# Altium PCB Sensor_Voltage_V1.1.PcbDoc
Units mm, origin at the board's own origin, x right, y up, seen from the top; angles counter-clockwise.
Board outline 74.8 x 24 mm, 2 copper layers (Top Layer, Bottom Layer), stack 1.58 mm thick; 41 components, 21 nets, 108 pads, 29 vias.
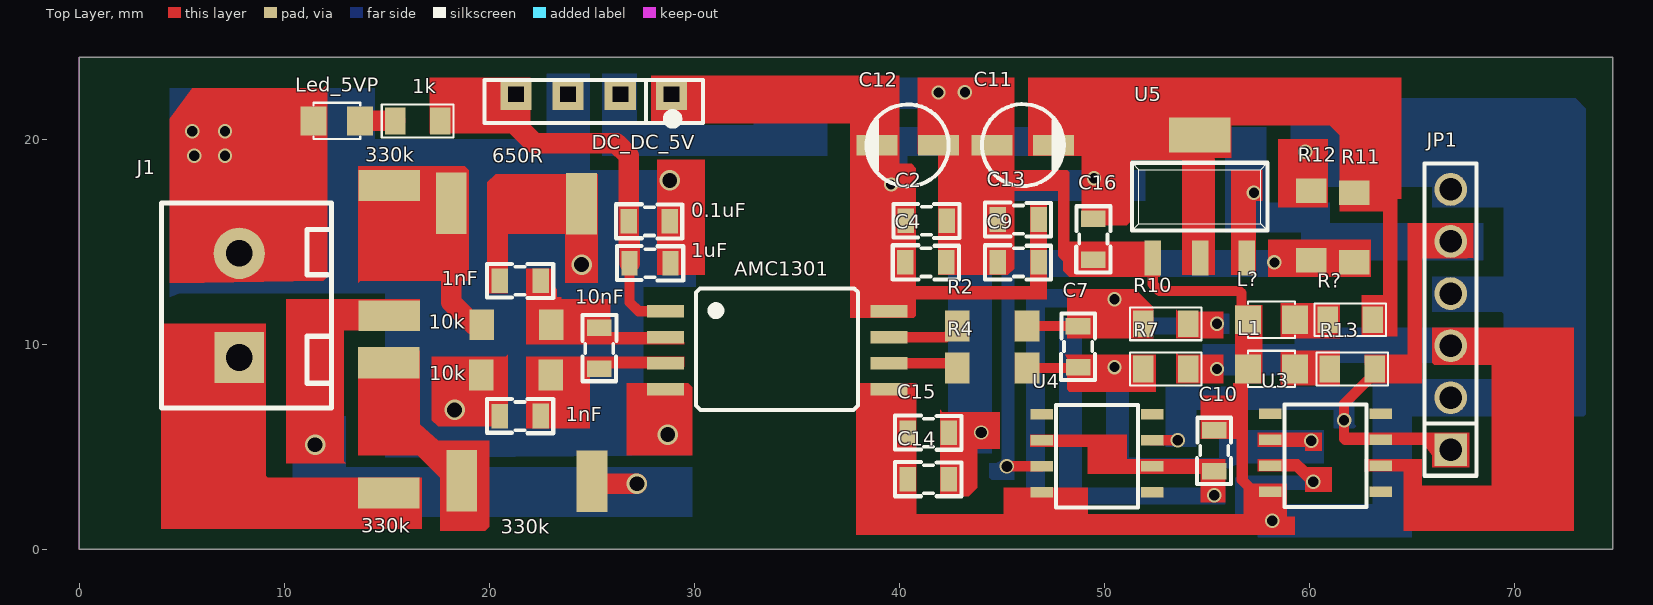
[diagram p0: Top Layer view]
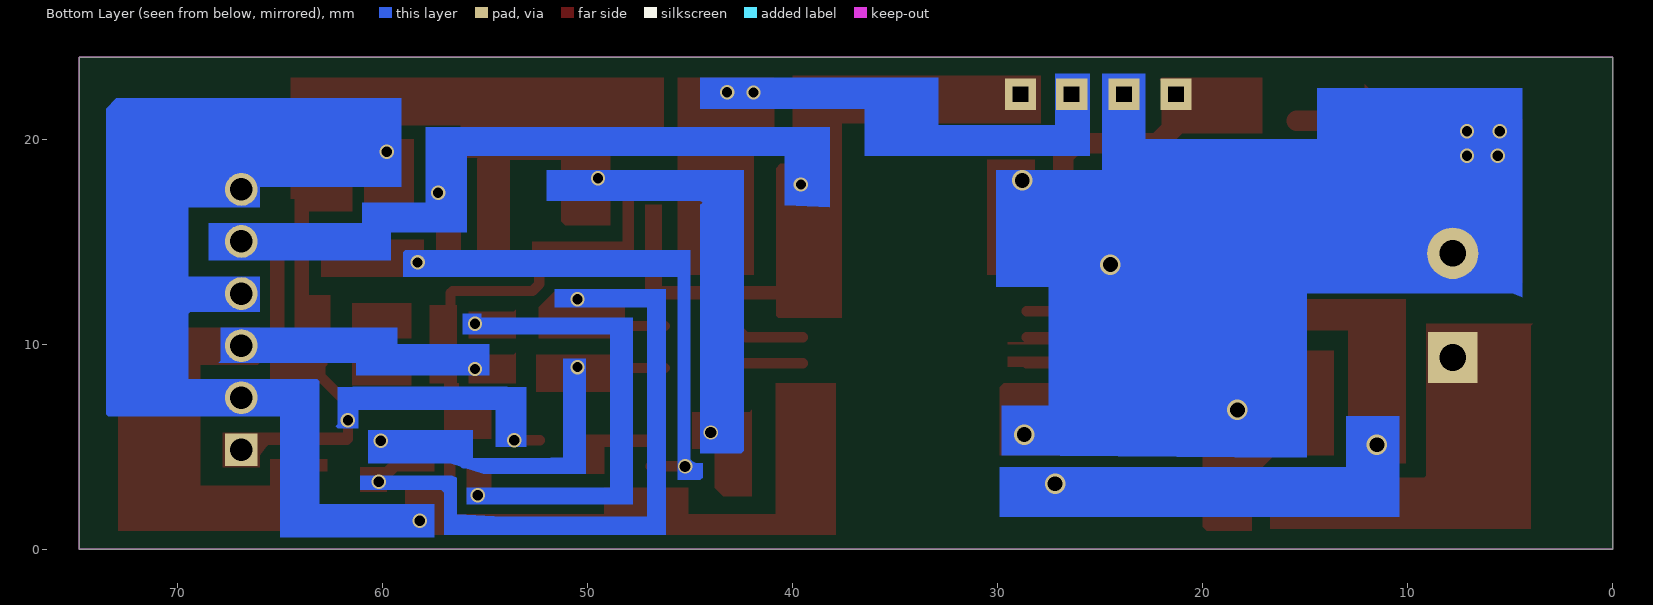
[diagram p1: Bottom Layer view, seen from below]
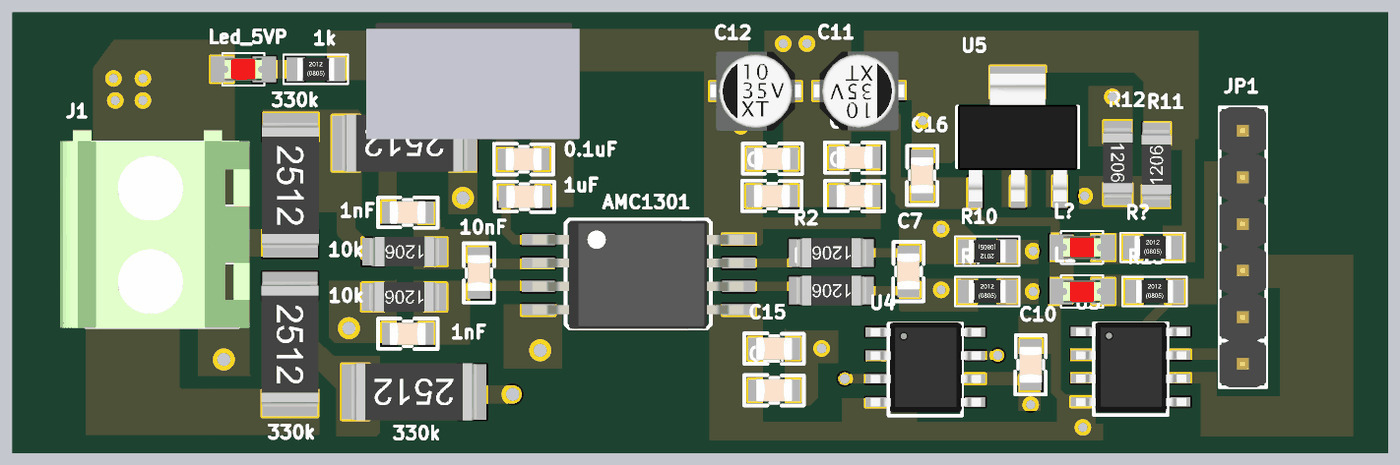
[diagram p2: 3D render of the assembled board from above, using the file's embedded part models]

## Layer stack, top to bottom
Top Solder: solder mask 0.01, Solder Resist, Dk 3.5
Top Layer: signal copper 0.035
Dielectric 1: dielectric 1.51, FR-4, Dk 4.8
Bottom Layer: signal copper 0.035
Bottom Solder: solder mask 0.01, Solder Resist, Dk 3.5

## Board outline
0,0 74.8,0 74.8,24 0,24

## Design rules (kind name [scope] priority, off if disabled: settings)
Clearance [All] p1: gap=0.5
PolygonConnect [All] p1: connectstyle=Relief reliefconductorwidth=0.254 reliefentries=4 polygonreliefangle="90 Angle" airgapwidth=0.254
RoutingVias [All] p1: holewidth=0.711 width=1.27 viastyle="Through Hole" minholewidth=0.711 minwidth=1.27 maxholewidth=0.711 maxwidth=1.27
SolderMaskExpansion [All] p1: expansion=0.102
Width [All] p1: maxlimit=2 minlimit=0.5 preferedwidth=0.5
30 further rules are at their usual default settings.

## Classes and differential pairs
component class Sensor_V1: 0.1uF 1k 1nF 1uF 10k 10nF 330k AMC1301 C2 C4 C7 C9 C10 C11 C12 C13 C14 C15 C16 DC_DC_5V J1 JP1 L1 L? led_5vP R R2 R4 R7 R10 R11 R12 R13 R? U3 U4 U5

## Components (designator, comment, footprint, x,y, rotation, side; value= is the part's Value field where it differs from the comment)
0.1uF "0.1uF" "Tu 0805_N" 27.8,16.003 r0 top (schematic designator C1)
1k "1K" RESC0805 16.5,20.9 r0 top (schematic designator R14)
1nF "1nF" "Tu 0805_N" 21.5,6.5 r180 top (schematic designator C6)
1nF "1nF" "Tu 0805_N" 21.5,13.1 r180 top (schematic designator C5)
1uF "1uF" "Tu 0805_N" 27.84,13.96 r180 top (schematic designator C3)
10k "10K" RES1206 21.32,10.96 r180 top (schematic designator R5)
10k "10K" RES1206 21.3,8.5 r180 top (schematic designator R1)
10nF "10nF" "Tu 0805_N" 25.37,9.81 r270 top (schematic designator C8)
330k "330K" RES_2512 14.892,5.934 r270 top (schematic designator R9)
330k "330K" RES_2512 21.844,3.538 r180 top (schematic designator R8)
330k "330K" RES_2512 14.91,14.58 r270 top (schematic designator R6)
650R "649" RES_2512 21.33,17.08 r180 top (schematic designator R3)
AMC1301 "AMC_1301" SOIC_8_SO8W 34.422,10.35 r0 top (schematic designator U1)
C2 "0.1uF" "Tu 0805_N" 41.32,16.027 r180 top
C4 "1uF" "Tu 0805_N" 41.3,14 r0 top
C7 "10nF" "Tu 0805_N" 48.72,9.89 r90 top
C9 "1uF" "Tu 0805_N" 45.8,14 r0 top
C10 "1uF" "Tu 0805_N" 55.36,4.81 r90 top
C11 "10uF_16V" tu_4x5.4mm 46.03,19.72 r180 top
C12 "10uF_16V" tu_4x5.4mm 40.41,19.71 r0 top
C13 "10nF" "Tu 0805_N" 45.8,16.093 r0 top
C14 "10nF" "Tu 0805_N" 41.42,3.42 r0 top
C15 "10nF" "Tu 0805_N" 41.42,5.69 r0 top
C16 "10nF" "Tu 0805_N" 49.467,15.13 r90 top
DC_DC_5V "DC_DC_5V" B0505S/D-1W 25.04,21.9 r0 top (schematic designator U2)
J1 "domino" domino_2pin_5.08mm 7.8,11.9 r90 top
JP1 "JP 1x6 2.54" "JP 1X6 DT" 66.9,4.86 r90 top
L1 "LED 0805" LED-0805-Red 59.3,8.8 r180 top
L? "LED 0805" LED-0805-Red 59.3,11.2 r180 top
Led_5VP "LED 0805" LED-0805-Red 13.7,20.9 r180 top (schematic designator L2)
R2 "10K" RES1206 44.53,10.9 r180 top
R4 "10K" RES1206 44.53,8.85 r180 top
R7 "7.5K" RESC0805 53,8.8 r0 top
R10 "7.5K" RESC0805 53,11 r180 top
R11 "1M" RES1206 62.2,15.7 r90 top
R12 "1M" RES1206 60.1,15.8 r270 top
R13 "1K" RESC0805 62.1,8.8 r0 top
R? "1K" RESC0805 62,11.2 r0 top
U3 "opamp_LM741" LM741 60.8,4.57 r0 top
U4 "opamp_LM741" LM741 49.64,4.55 r0 top
U5 "AMS1117_3.3V" TO-252 54.66,17.21 r0 top

## Footprints (in the part's own frame and the unit in brackets; to place one, negate y for a bottom-side part, rotate by r counter-clockwise, add the part's x,y. Pads: shape width x height; smd on the part's side, far side on the other; paste and mask are expansions set on the pad)
B0505S/D-1W [mm] "B0512S/D-1W"
  rect 1.52x1.52 hole 0.75 square: 1(3.85,0.3) 2(1.35,0.3) 3(-1.2,0.3) 4(-3.74,0.3)
  silkscreen extent -5.28,-1.12 5.38,1, body extent -5.8,-4.8 5.8,1.52, height 18.66
domino_2pin_5.08mm [mm]
  rect 2.5x2.4 hole 1.3: 1(-2.54,0)
  round 2.5 hole 1.3: 2(2.54,0)
  silkscreen extent -5,-4.5 5,3.8, body extent -5.08,-5.1 5.68,5.2, height 13.59
"JP 1X6 DT" [mm] "6 pins, 1 row, straight, gold plating"
  rect 1.6x1.6 hole 1.1: 1(0,0)
  round 1.6 hole 1.1: 2(2.54,0) 3(5.08,0) 4(7.62,0) 5(10.16,0) 6(12.7,0)
  silkscreen extent -1.27,-1.27 13.97,1.27, body extent -1.27,-1.27 13.97,1.27, height 8.54
LED-0805-Red [mil]
  rect 50x55 smd: 1(0,0) 2(90,0)
  silkscreen extent 0,-35 90,35, body extent 5,-25 85,25, height 43
LM741 [mm] "LM741"
  rect 1.1x0.51 smd: 1(-2.7,2.04) 3(-2.7,-0.5) 4(-2.7,-1.77) 5(2.7,-1.77) 6(2.7,-0.5) 7(2.7,0.77) 8(2.7,2.04)
  rect 1.1x0.52 smd: 2(-2.7,0.77)
  silkscreen extent -2,-2.5 2,2.5, body extent -2.98,-2.33 3.02,2.57, height 1.7
RES1206 [mm]
  rect 1.2x1.5 smd: 1(-1.7,0) 2(1.7,0)
  body extent -1.9,-0.8 1.9,0.8, height 0.6
RES_2512 [mm]
  rect 1.5x3 smd: 1(3.185,0.2)
  rect 1.524x3 smd: 2(-3.166,0.208)
  body extent -3.4,-1.35 3.4,1.75, height 0.6
RESC0805 [mm] "Chip Resistor, Body 2.0x1.3mm, IPC High Density"
  rect 1x1.3 smd: 1(-1.1,0) 2(1.1,0)
  silkscreen extent -1.75,-0.8 1.75,0.8, body extent -0.99,-0.62 1.01,0.63, height 0.45
SOIC_8_SO8W [mm] "AMC_1301"
  rect 1.8x0.6 smd: 1(-5.832,1.27) 2(-5.832,0) 3(-5.832,-1.27) 4(-5.832,-2.54) 5(5.08,-2.54) 6(5.08,-1.27) 7(5.08,0) 8(5.08,1.27)
  silkscreen extent -4.35,-3.55 3.55,2.37, body extent -6.15,-3.58 5.35,2.32, height 2.7
TO-252 [mm] "TO-252"
  rect 0.8x1.705 smd: 1(-2.3,-3) 2(0.02,-3) 3(2.3,-3)
  rect 3x1.705 smd: 2(0,3)
  silkscreen extent -3.3,-1.65 3.3,1.65, body extent -3.25,-3.5 3.25,3.46, height 1.7
"Tu 0805_N" [mm] "Compoment SMD 80x50mil"
  rect 0.8x1.2 smd: 1(-1,-0.003) 2(1,0)
  silkscreen extent -1.62,-0.83 1.61,0.83, body extent -1,-0.62 1,0.63, height 1.26
tu_4x5.4mm [mm]
  rect 2x1 smd: 1(-1.5,0) 2(1.5,0)
  silkscreen extent -2,-2 2,2, body extent -2.45,-2.15 2.45,2.15, height 5.4

## Part data
0.1uF 1nF 1nF 1uF 10nF C2 C4 C7 C9 C10 C13 C14 C15 C16: library part cap_0805
1k 10k 10k 330k 330k 330k 650R R2 R4 R7 R10 R11 R12 R13 R?: library part 311-0.0GRTR-ND
C11 C12: library part capacitor_electric, "capacitor_electric"
DC_DC_5V: library part DC_DC_5v
JP1: library part "JP 1x6 2.54 Duc Thang", "C?m"
L1 L? Led_5VP: library part "LED 0805 Do", "Dán"
U5: library part AMS1117CD, "AMS1117CD"

## Via types
v1: diameter 0.7, hole 0.5, Top Layer to Bottom Layer, 21 vias
v2: diameter 1, hole 0.72, Top Layer to Bottom Layer, 6 vias
v3: diameter 0.7, hole 0.54, Top Layer to Bottom Layer, 2 vias

## Nets (pads, with @x,y where several pads share a name; then routed paths per layer and width w, separated by ;. In a path a pad name is that pad's centre, name@x,y a point inside that pad or via, vN(x,y) a via of type N, cw(c..) or ccw(c..) an arc to the next point about the centre after c; other vN are vias at no path point)
GND_D: AMC1301.5 C2.1 C4.2 C9.1 C10.2 C11.2 C12.2 C13.1 C14.1 C15.1 C16.1 DC_DC_5V.2 JP1.2 JP1.4 JP1.6 L1.2 L?.2 R12.1 U3.4 U4.4 U5.1 | length 137.6
  Top Layer w0.5: AMC1301.5 39.502,5.798 39.613,5.687 C15.1 C14.1 40.42,1.82 40.94,1.3 46.94,1.3 ; v1(41.91,22.29) C12.2 42.32,19.3 C2.1 42.32,14.02 C4.2 44.797,14 C9.1 C13.1 44.8,18.1 ; C11.2 44.8,19.45 44.8,18.1 ; U4.4@46.84,2.68 U4.4 46.94,1.3 ; v1(58.2,1.4) v1@58.1,1.5 ; R12.1@59.8,17.5 v1(59.8,19.4) ; 44.8,18.1 47.5,18.1 48,17.6 48,14.4 48.27,14.13 C16.1 49.55,14.21 U5.1 52.36,12.94 52.7,12.6 56.6,12.6 56.7,12.5 56.7,7 55.6,7 55.36,6.76 C10.2 56.39,5.81 56.713,5.487 56.713,3.387 57.287,2.813 58.087,2.813 U3.4 v1@58.1,1.5 ; 46.94,1.3 57.9,1.3 v1@58.1,1.5
  Bottom Layer w1: DC_DC_5V.2 26.39,20.21 26.7,19.9 33.4,19.9 35.8,22.3 v1@42,22.3 ; v1(58.2,1.4) 63.4,1.4 64,2 64,7.1 64.3,7.4 JP1.2 69.6,7.4 70.2,8 70.2,12.9 ; v1(59.8,19.4) 66.3,19.4 66.9,18.8 JP1.6 69.54,17.56 70.2,16.9 70.2,12.9 ; JP1.4 69.78,12.48 70.2,12.9
  other v1: 43.2,22.3
GND_P: 0.1uF.2 1nF.2 1uF.1 10k.2@19.6,8.5 650R.2 AMC1301.4 DC_DC_5V.3 J1.2 Led_5VP.2 | length 78.3
  Top Layer w0.5: J1.2 7.8,20 8.7,20.9 Led_5VP.2 ; 10k.2@19.63,8.53 17.63,8.53 17.63,7.17 18.3,6.5 1nF.2@20.5,6.5 ; 1nF.2@20.5,13.5 20.5,16.5 20.872,16.872 650R.2 v2(24.496,13.896) ; AMC1301.4 28.59,5.71 v2(28.7,5.6)
  Top Layer w1: v2(28.8,18) 0.1uF.2 28.8,14.003 1uF.1
  Bottom Layer w2: J1.2 8.46,15.1 17.7,15.1 ; DC_DC_5V.3 23.84,19.24 21.65,17.05 21.65,15.45 ; v2(24.496,13.896) 21.65,13.896 21.65,15.45 ; v2(28.7,5.6) 19.5,5.6 17.7,7.4 17.7,15.1 ; 17.7,15.1 21.3,15.1 21.65,15.45
  other v1: 5.6,19.2 7.1,19.2 5.5,20.4 7.1,20.4
  other v2: 18.3,6.8
NetC1_1: 0.1uF.1 1k.2 1uF.2 AMC1301.1 DC_DC_5V.4 | length 21.5
  Top Layer w0.5: 1uF.2 26.84,12.06 27.28,11.62 AMC1301.1
  Top Layer w1: 1k.2 17.6,21.8 18,22.2 DC_DC_5V.4 21.3,20.7 22.2,19.8 26.2,19.8 26.8,19.2 0.1uF.1 26.8,15 26.84,14.96 1uF.2
NetC2_2: AMC1301.8 C2.2 C4.1 C9.2 C12.1 C13.2 DC_DC_5V.1 JP1.1 JP1.5 R13.2 U3.7 U4.7 U5.3 | length 100.2
  Top Layer w0.5: DC_DC_5V.1 38.4,22.2 38.91,21.69 C12.1 39.6,19.02 v1(39.6,17.8) 39.6,16.746 C2.2 40.32,14.016 C4.1 ; AMC1301.8 39.502,13.602 39.897,13.997 C4.1 ; C13.2 C9.2 46.8,12.8 46.6,12.6 40.7,12.6 40.3,13 C4.1 ; U4.7 v1(53.58,5.32) ; U5.3 56.96,17.06 v1(57.3,17.4) ; R13.2 R13.2@63.2,8.6 ; JP1.1@66.2,4.82 65.68,5.34 U3.7 61.76,5.34 61.7,5.4 v1(61.7,6.3) 61.7,7.1 R13.2@63.2,8.6 ; JP1.5 65.42,15.02 65.1,14.7 65.1,8.9 64.8,8.6 R13.2@63.2,8.6
  Bottom Layer w0.5: v1(53.58,5.32) 53.58,7.28 54,7.7 61.4,7.7 61.7,7.4 v1(61.7,6.3)
  Bottom Layer w1: v1(39.6,17.8) 39.6,19.5 40.2,20.1 56.6,20.1 57.3,19.4 v1(57.3,17.4) 57.3,16.4 57.6,16.1 59.9,16.1 60.8,15.2 66.72,15.2 JP1.5
NetC5_1: 1nF.1@22.5,13.103 10k.1@23.02,10.96 10nF.1 AMC1301.2 | length 8.2
  Top Layer w0.5: 1nF.1@22.5,13.103 23.02,12.583 23.02,10.96 23.17,10.81 10nF.1 25.827,10.35 AMC1301.2
NetC6_1: 1nF.1@22.5,6.503 10k.1@23,8.5 10nF.2 AMC1301.3 | length 8
  Top Layer w0.5: 1nF.1@22.5,6.503 23.03,7.033 23.03,8.53 23.31,8.81 10nF.2 25.64,9.08 AMC1301.3
NetC7_1: C7.1 R4.1 R7.1 U3.2 | length 22.6
  Top Layer w0.5: R4.1 48.683,8.85 C7.1 v1(50.5,8.89) 51.91,8.89 R7.1@52,8.8 ; U3.2 60.06,5.34 v1(60.1,5.3)
  Bottom Layer w0.5: v1(50.5,8.89) 50.5,4.6 50.9,4.2 56.039,4.2 56.189,4.35 56.25,4.35 56.4,4.5 56.4,5 56.7,5.3 v1(60.1,5.3)
NetC7_2: C7.2 R2.1 R10.2 U3.3 | length 39.8
  Top Layer w0.5: R2.1 C7.2@48.71,10.9 ; C7.2 C7.2@48.71,10.9 ; R10.2@52,11 R10.2 51.9,11.9 51.6,12.2 v1(50.5,12.2) 49,12.2 48.71,11.91 C7.2@48.71,10.9 ; U3.3 59.43,4.07 v1(60.2,3.3)
  Bottom Layer w0.5: v1(50.5,12.2) 47.1,12.2 46.7,11.8 46.7,1.6 47.2,1.1 56.2,1.1 56.7,1.6 56.7,2.8 57.2,3.3 v1(60.2,3.3)
NetC10_1: C10.1 R10.1 U4.2 U4.6 | length 34.7
  Top Layer w0.5: U4.2 50.48,5.32 50.8,5 50.8,4.25 51,4.05 U4.6 55.123,4.05 C10.1 v1(55.363,2.637) ; R10.1 v1@55.3,11
  Bottom Layer w0.5: v1(55.363,2.637) 55.177,2.45 48.35,2.45 48.1,2.7 48.1,10.4 48.7,11 v1(55.5,11)
NetC11_1: C11.1 C14.2 C15.2 C16.2 R11.2 R?.2 U5.2 | length 58.2
  Top Layer w0.5: C14.2 C15.2 43.99,5.69 v3(44,5.7) ; C11.1 49.467,19.72 ; C16.2 49.467,19.72 ; U5.2@54.68,14.21 54.66,14.23 U5.2@54.66,20.21 ; R?.2 63.9,11.2 63.9,17.2 63.7,17.4 R11.2 62.2,20.4 61.5,21.1 55.55,21.1 U5.2@54.66,20.21 ; 49.467,19.72 54.17,19.72 U5.2@54.66,20.21
  Bottom Layer w0.5: v3(44,5.7) 44,17.6 44.5,18.1 v1(49.5,18.1)
NetJ1_1: 330k.1@15.092,2.749 J1.1 | length 13.5
  Top Layer w1: J1.1 7.8,3.5 8.551,2.749 330k.1@15.092,2.749
NetJP1_3: JP1.3 R7.2 U3.6 | length 33.5
  Top Layer w0.5: R7.2 v1@55.3,8.8 ; U3.6 64.77,4.07 65.2,3.64 65.2,1.8 65.6,1.4 69.8,1.4 70.1,1.7 70.1,9.3 69.46,9.94 JP1.3
  Bottom Layer w0.5: v1(55.5,8.8) 55.5,9.6 55.6,9.7 66.66,9.7 JP1.3
NetL1_1: L1.1 R13.1 | length 1.7
  Top Layer w0.5: L1.1 60.98,8.8 60.99,8.79 R13.1
NetL2_1: 1k.1 Led_5VP.1 | length 1.7
  Top Layer w1: Led_5VP.1 1k.1
NetL?_1: L?.1 R?.1 | length 1.6
  Top Layer w0.5: L?.1 R?.1
NetR2_2: AMC1301.7 R2.2 | length 3.6
  Top Layer w0.5: AMC1301.7 42.28,10.35 R2.2
NetR3_1: 10k.2@19.62,10.96 330k.2@15.118,17.746 650R.1 | length 10.1
  Top Layer w1: 330k.2@15.118,17.746 17.279,17.746 650R.1 18.145,12.055 19.24,10.96 10k.2@19.62,10.96
NetR4_2: AMC1301.6 R4.2 | length 3.4
  Top Layer w0.5: AMC1301.6 42.6,9.08 R4.2
NetR6_1: 330k.1@15.11,11.395 330k.2@25.01,3.33 | length 28.8
  Top Layer w0.5: 330k.2@25.01,3.33 330k.2@25.14,3.2
  Top Layer w1: v2(11.5,5.1) 11.5,10.8 12.095,11.395 330k.1@15.11,11.395 ; 330k.2@25.14,3.2 v2(27.2,3.2)
  Bottom Layer w1: v2(11.5,5.1) 11.5,4.2 12.5,3.2 v2(27.2,3.2)
NetR8_1: 330k.1@18.659,3.338 330k.2@15.1,9.1 | length 7.2
  Top Layer w0.5: 330k.2@15.1,9.1 15.1,6.897 330k.1@18.659,3.338
NetR11_1: R11.1 R12.2 U4.3 | length 28.6
  Top Layer w0.5: v3(45.25,4.05) U4.3 ; v1(58.3,14) 58.4,14.1 R12.2@59.8,14.1 ; R12.2 R12.2@59.8,14.1 ; R11.1 59.9,14 R12.2@59.8,14.1
  Bottom Layer w0.5: v3(45.25,4.05) 45.25,13.35 45.9,14 v1(58.3,14)
pads on no net: U3.1 U3.5 U3.8 U4.1 U4.5 U4.8

## Keep-outs
Keep-Out Layer:
  the board outline again, w0.05

## Other copper
Top Layer:
  region net NetC7_2: 59.8,2.8 59.8,3.3 59.3,3.8 57.5,3.8 57.5,4.4 59.5,4.4 59.9,4 61,4 61.1,4 61.1,3.9 61.1,2.8
  region net NetC7_1: 57.5,5.2 57.5,5.5 57.5,5.7 60.6,5.7 60.6,4.9 60.6,4.8 60.2,4.8 59.8,4.8 59.8,4.9 59.8,5 57.5,5
  region net NetJP1_3: 53.5,8.1 53.5,9.6 53.6,9.5 55.8,9.5 55.8,8.1
  region net NetC10_1: 53.5,10.3 53.5,11.7 53.6,11.6 55.8,11.6 55.8,10.3
  region net NetC2_2: 67.8,5.7 66,5.7 64,5.7 62.1,5.7 61.7,5.7 61.7,5.1 65.6,5.1 66,4.6 66,4 67.8,4
  region net NetC2_2: 40.5,12.8 40.5,12.3 40.5,12.2 43.8,12.2 47.1,12.2 47.2,12.2 47.2,12.4 47.2,16.8 46.4,16.8 46.4,12.8
  region net NetC10_1: 54.7,2.8 54.7,2.3 55.9,2.3 55.9,4.4 51.1,4.4 51.1,5.6 50.2,5.6 49.4,5.6 49.204,5.6 47.5,5.6 46.4,5.6 46.4,5 49.2,5 49.204,4.4 49.2,3.7 50.4,3.7 50.8,3.7 50.9,3.7 54.7,3.7
  region net GND_D: 54.7,5.9 54.7,5.4 56.5,5.4 56.5,3.3 57.066,3.192 57,3.5 57,4 57,5.2 57,5.3 57,5.9 57,7.9 57,8 57,8.3 56.4,8.3 56.4,8.1 56.3,8.1 56.3,8 56.3,7.8 56.3,7.5 54.7,7.5
  region net GND_D: 45.5,18.5 48.2,18.5 48.3,18.4 48.3,15 47.8,15 47.8,17.5 45.5,17.5
  region net NetC10_1: 54.8,2.4 54.9,2.3 55.9,2.3 55.9,3.3 55.9,4.2 54.8,4.2
  region net NetC2_2: 57.7,17 57.7,18.5 56.2,18.5 56.2,13.4 56.4,13.4 57.4,13.4 57.4,17
  region net NetC2_2: 67.7,14.2 68,14.2 68,15.1 68,15.9 67.7,15.9 65.2,15.9 64.8,15.9 64.8,15.5 64.8,9.5 63.8,9.5 62.7,9.5 62.7,9 62.8,8.9 62.8,8.1 65.5,8.1 65.5,14.2
  region net NetC7_1: 48.2,9.3 48.2,7.8 48.3,7.7 52.5,7.7 52.5,9.5 48.1,9.5
  region net NetC7_2: 52.4,10.3 48.2,10.3 48.2,12.7 51.5,12.7 52.4,11.8
  region net NetR11_1: 63,13.3 63,15.1 58,15.1 58,13.3
  region net NetC11_1: 55.4,13.4 55.4,15.1 55.4,19.05 55.15,19.3 53.8,19.3 53.8,15.3 53.8,13.4 54.1,13.4 54.3,13.4
  region net NetR6_1: 16.6,10.7 16.6,12.1 16.6,12.2 16,12.2 10.1,12.2 10.1,11.9 10.1,10.4 10.1,9.9 10.1,4.2 10.4,4.2 13,4.2 12.9,4.3 12.9,10.7
  region net NetC11_1: 61.5,16.9 61.5,17.9 63.85,17.9 64.3,17.45 64.3,10.4 62.55,10.4 62.55,12.4 63.6,12.4 63.6,12.6 63.6,12.8 63.6,13.1 63.6,14.8 63.6,16.5 62.7,16.5 61.5,16.5
  region net NetJP1_3: 66,10.8 66,9.1 66.1,9 68.9,9 68.9,3.1 68.6,3.1 67.3,3.1 66.1,3.1 65.5,3.1 65.5,3.8 65.5,4.4 64.9,4.4 62.7,4.4 62.7,3.8 64.6,3.8 64.6,2.8 64.6,0.9 64.7,0.9 64.8,0.9 65,0.9 72.8,0.9 72.9,0.9 72.9,1.2 72.9,1.4 72.9,10.8
  region net GND_D: 60.9,20 58.5,20 58.5,17.1 58.5,16.7 58.9,16.7 60.9,16.7 60.9,17
  region net GND_D: 52.7,15 48,15 48,13.6 48.3,13.3 52.7,13.3
  region net NetC11_1: 64.1,17.1 64.5,17.1 64.5,23 64.1,23 63,23 53.6,23 53.6,20.8 53.7,20.7 61,20.7 61.5,20.2 61.5,17
  region net GND_D: 41.1,19.3 41.9,19.3 41.9,13.4 45.3,13.4 45.6,13.7 45.6,20.3 45.6,23 44.6,23 43.3,23 40.9,23 40.9,19.3
  region net NetC11_1: 48.9,15.8 51.1,15.8 51.3,16 51.3,19 54.6,19 54.5,19.1 56.2,19.1 56.2,21.6 54.5,21.6 54.5,23 53.6,23 46.3,23 46.3,21.3 46.3,19.2 48.9,19.2
  region net NetL1_1: 61.4,9.7 58.6,9.7 58.6,8 61.5,8 61.5,9.7
  region net NetL?_1: 61.4,12 58.6,12 58.6,10.3 61.5,10.3 61.5,12
  region net NetC2_2: 38.8,18.7 37.6,18.809 37.6,11.3 40.7,11.3 40.8,11.4 40.8,18.6 40.6,18.8 39,18.8
  region net NetC2_2: 27.9,23.1 28.4,23.1 39.243,23.1 40,23.1 40,22.9 40,18.7 39.6,18.7 38,18.7 37.8,18.7 37.6,18.809 37.6,18.9 37.6,20.8 29.8,20.8 27.9,20.8 27.9,21 27.9,21.1 27.9,23
  region net GND_D: 56.8,1.6 56.8,3.3 56.9,3.2 58.9,3.2 58.9,1.4 59,1.3 56.8,1.3
  region net GND_D: 57.7,11.9 57.7,8.1 56.4,8.1 56.4,11.9
  region net NetC11_1: 42,2.6 43.4,2.6 43.8,3 43.8,4.9 44.9,4.9 44.9,5.1 44.9,5.2 44.9,5.4 44.9,6.7 42.1,6.7 42,6.8
  region net GND_D: 45.1,3 45.1,1.3 49.1,1.3 49.2,1.4 49.2,3
  region net GND_D: 40.4,8.1 37.9,8.1 37.9,0.7 38,0.7 38.2,0.7 59.3,0.7 59.3,1.6 58.8,1.6 58.8,1.7 40.819,1.7 40.819,8.1
  region net NetR8_1: 13.6,9.7 13.6,4.6 16.5,4.6 16.8,4.3 17.1,4 17.6,3.5 17.6,0.9 19.8,0.9 20,1.1 20,5.3 17.5,5.3 16.6,6.1 16.6,6.9 16.6,9.7
  region net GND_P: 28.2,13.4 29.4,13.4 30.5,13.4 30.5,14.5 30.5,19 28.2,19
  region net NetC5_1: 21.8,13.7 21.8,10.2 21.8,10.122 21.8,10 22.8,10.011 25.9,10 28.7,10 29.5,10 29.5,10.1 25.9,10.1 25.9,12.2 25.5,12.2 23.6,12.2 23.5,12.2 23.5,12.3 23.3,12.3 23.3,12.7 23,13 23,13.7
  region net NetC6_1: 24.9,5.9 24.9,8.7 24.9,8.9 29.5,8.9 29.5,9.4 27.5,9.4 23.7,9.4 21.8,9.4 21.8,9.3 21.8,5.9 22.1,5.9
  region net NetR3_1: 13.6,13 13.7,13.1 19,13.1 19,18.5 18.8,18.7 13.6,18.7
  region net NetC1_1: 17.1,20.3 17.1,23 22,23 22.1,22.9 22,22.8 22,20.3
  region net GND_P: 26.7,8.1 26.7,4.6 29.9,4.6 29.9,7.9 29.7,8.1
  region net NetJ1_1: 9.1,11 3.9,11 4,10.9 4,1.5 4,1 15.9,1 16.7,1 16.7,1.1 16.7,1.2 16.7,3.5 9.2,3.5 9.1,3.6
  region net GND_P: 6.1,13 4.4,13 4.4,14.1 4.4,17.6 4.4,21 5.5,22.5 11.9,22.5 12.1,22.7 12.1,13.3 11.9,13.1
  region net GND_P: 25.3,15.4 25.3,18.3 20.3,18.3 19.9,17.9 19.9,12.6 20,12.5 20.9,12.5 20.9,15.4 21.3,15.4 21.7,15.4 23.3,15.4 23.7,15.4 23.7,13 24.5,13 25.3,13
  region net GND_P: 20.9,6 20.9,9.5 20.8,9.4 17.2,9.4 17.2,6.3 17.5,6
Bottom Layer:
  region net NetC10_1: 54.8,10.5 56.1,10.5 56.1,11.5 55.2,11.5 55.2,11.3 47.8,11.3 47.8,7.7 47.8,2.2 53.1,2.2 55.9,2.2 55.9,3 48.9,3 48.9,7.6 48.9,10.5 49.1,10.5
  region net NetC2_2: 53.1,5 54.3,5 54.5,5 54.5,5.2 54.5,6.8 57.6,6.8 60.8,6.8 61.2,6.8 61.2,5.9 62.2,5.9 62.3,6 62.2,6.1 62.2,7.9 57.6,7.9 53,7.9 53,5
  region net NetC7_1: 60.7,4.2 60.7,4.8 60.7,4.9 60.7,5.38 60.7,5.8 60.6,5.8 56.2,5.8 55.6,5.8 55.6,5.5 55.6,4.6 55.6,4.4 54.8,4.4 53.6,4.4 51.2,4.5 51.2,9.3 50.2,9.3 50.1,9.3 50.1,7.7 50.1,4 50.1,3.7 50.2,3.7 50.7,3.7 51.2,3.7 55.1,3.7 56.1,4 56.7,4.2
  region net NetJP1_3: 68,9.1 67.9,9.2 67.9,10.8 60.1,10.8 59.3,10.8 59.3,10 55.1,10 54.8,10 54.8,9.2 54.8,8.5 55.1,8.5 56.5,8.5 60.9,8.5 61.3,8.5 61.3,8.8 61.3,9.1
  region net NetR6_1: 27.2,4 29.9,4 29.9,1.6 27.6,1.6 10.4,1.6 10.4,6.5 13,6.5 13,4
  region net NetC7_2: 50,12.7 51.6,12.7 51.6,11.8 49.7,11.8 49.3,11.8 47.1,11.8 47.1,11.6 47.1,1.6 54.1,1.6 56.4,1.7 56.4,3.5 56.6,3.6 61.1,3.6 61.1,2.9 57,2.9 57,0.7 46.7,0.7 46.2,0.7 46.2,12.7
  region net NetC2_2: 63.3,14.1 68.5,14.1 68.5,15.9 66,15.9 61,15.9 61,16.9 57.9,16.9 57.9,16.1 57.9,19.1 57.9,20.6 48.7,20.6 40.4,20.6 38.2,20.6 38.2,18.1 38.2,16.7 40.4,16.784 40.4,19.5 40.4,19.2 55.9,19.2 55.9,15.57 55.9,15.476 57.1,15.476 59.621,15.476 59.621,14.1 60.1,14.1 60.8,14.1
  region net NetR11_1: 59,13.6 59,14.5 58.9,14.6 45,14.6 45,4.4 44.9,4.3 44.7,4.2 44.4,4.2 44.4,3.5 44.5,3.4 45.6,3.4 45.6,13.3 45.8,13.3 46.5,13.3 46.9,13.3 52.9,13.3 59,13.3
  region net GND_D: 65.8,8.3 63.2,8.3 63.1,8.2 63.1,2.2 57.5,2.2 57.5,0.6 65,0.6 65,6.5 65.8,6.5
  region net GND_D: 27.2,23.2 25.5,23.2 25.5,19.2 34,19.2 36.492,19.2 36.492,21.5 36.7,21.5 41.5,21.5 43,21.5 44.5,21.5 44.5,22.3 44.5,23 43,23 34,23 33.5,23 32.9,23 32.9,20.7 27.2,20.7
  region net GND_D: 59.1,18.5 59.1,20.5 59.1,22 60.6,22 73,22 73.5,21.5 73.5,13.3 69.5,13.3 69.5,16.7 66,16.7 66,17.7 59.1,17.7
  region net NetC11_1: 52,18.5 42.4,18.5 42.4,4.8 42.5,4.7 44.5,4.7 44.5,16.8 44.4,16.9 44.5,17 52,17
  region net GND_D: 66,13.3 66,11.6 69.4,11.6 69.5,11.5 69.5,8.3 65.8,8.3 65.8,6.5 73.4,6.5 73.5,6.6 73.5,13.3
  region net GND_P: 4.4,20.9 4.4,12.3 4.9,12.5 6.9,12.5 9.7,12.5 10.4,12.5 11,12.5 14.931,12.5 14.931,4.5 18.431,4.5 29.8,4.6 29.8,7 27.5,7 27.5,12.8 30.078,12.8 30.078,16.4 30.078,18.4 30.078,18.5 27.1,18.5 24.9,18.5 24.9,18.8 24.9,23 24.9,23.2 22.8,23.2 22.8,22.3 22.8,20 21.1,20 19.3,20 14.4,20 14.4,22.5 11.5,22.5 4.4,22.5